# Altium PCB pcb.pcbdoc
Units mil, origin at the board's own origin, x right, y up, seen from the top; angles counter-clockwise.
Board outline 6000 x 4000 mil, 2 copper layers (Top Layer, Bottom Layer); 43 components, 33 nets, 134 pads, 50 vias.
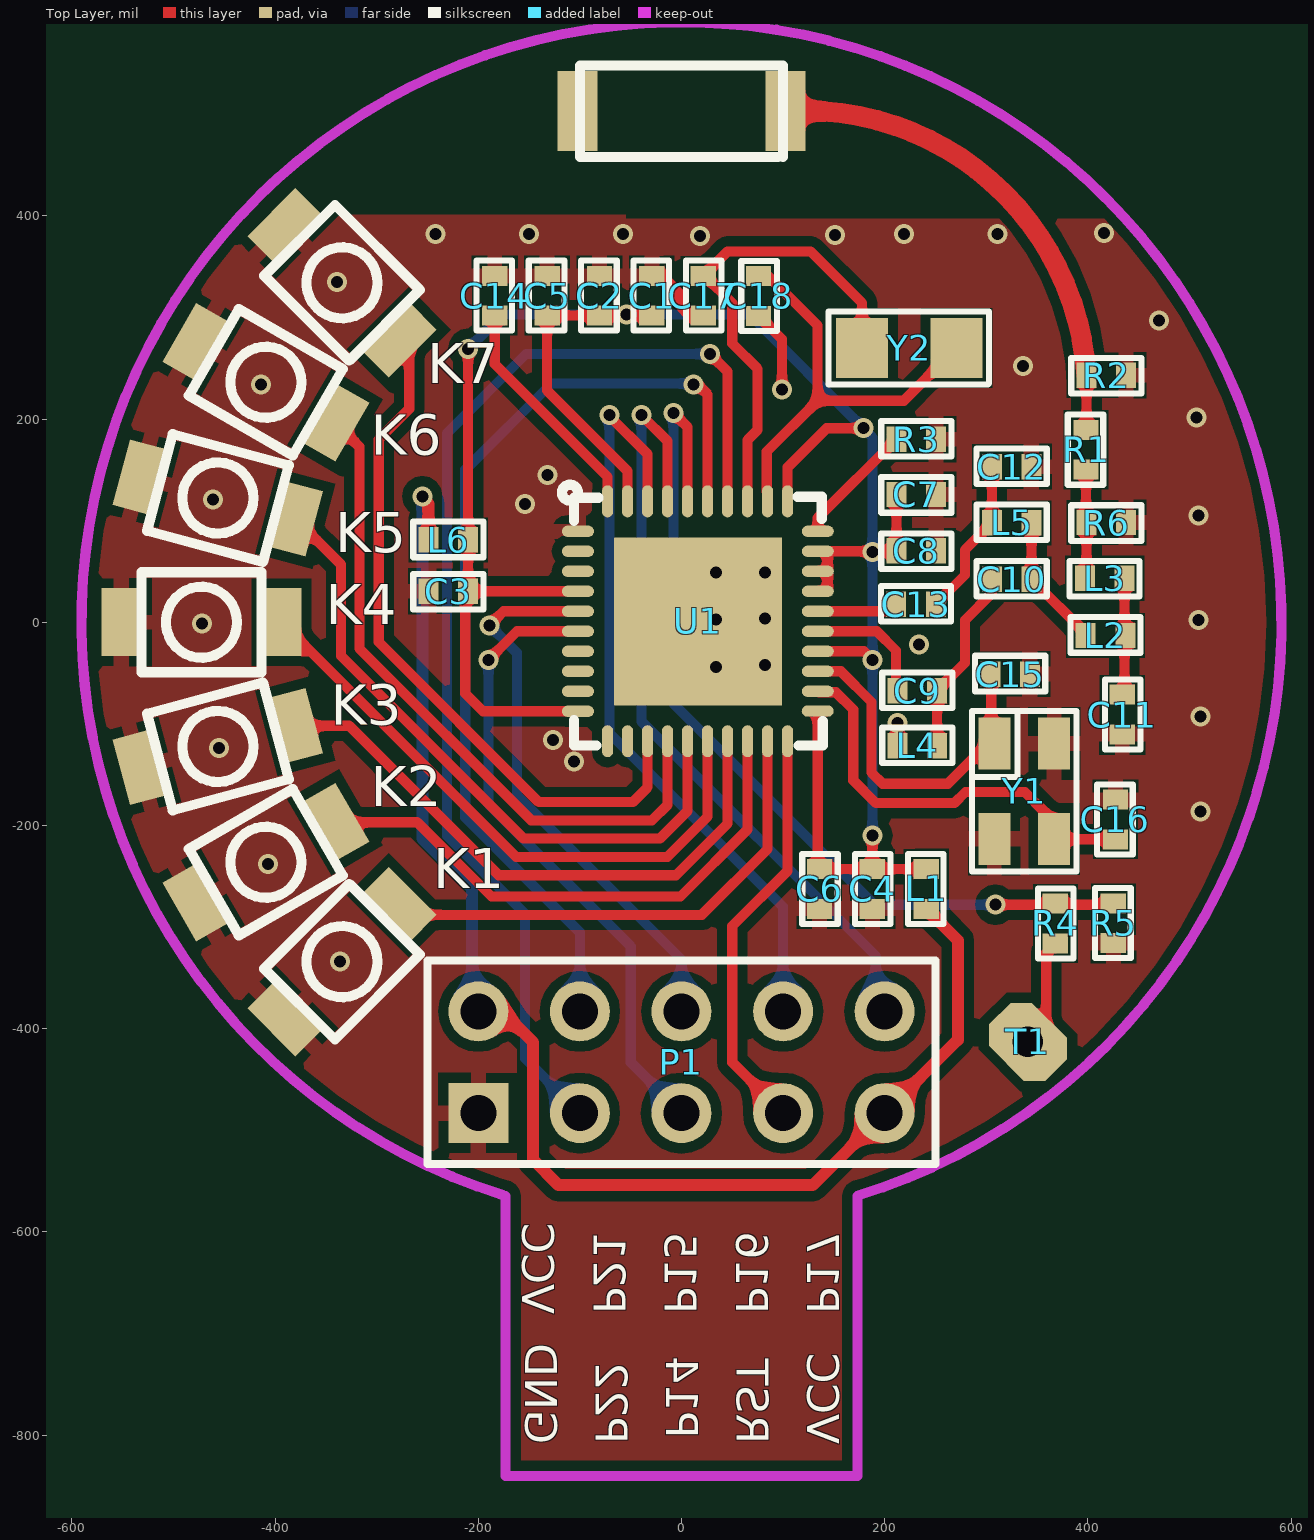
[diagram p0: Top Layer view]
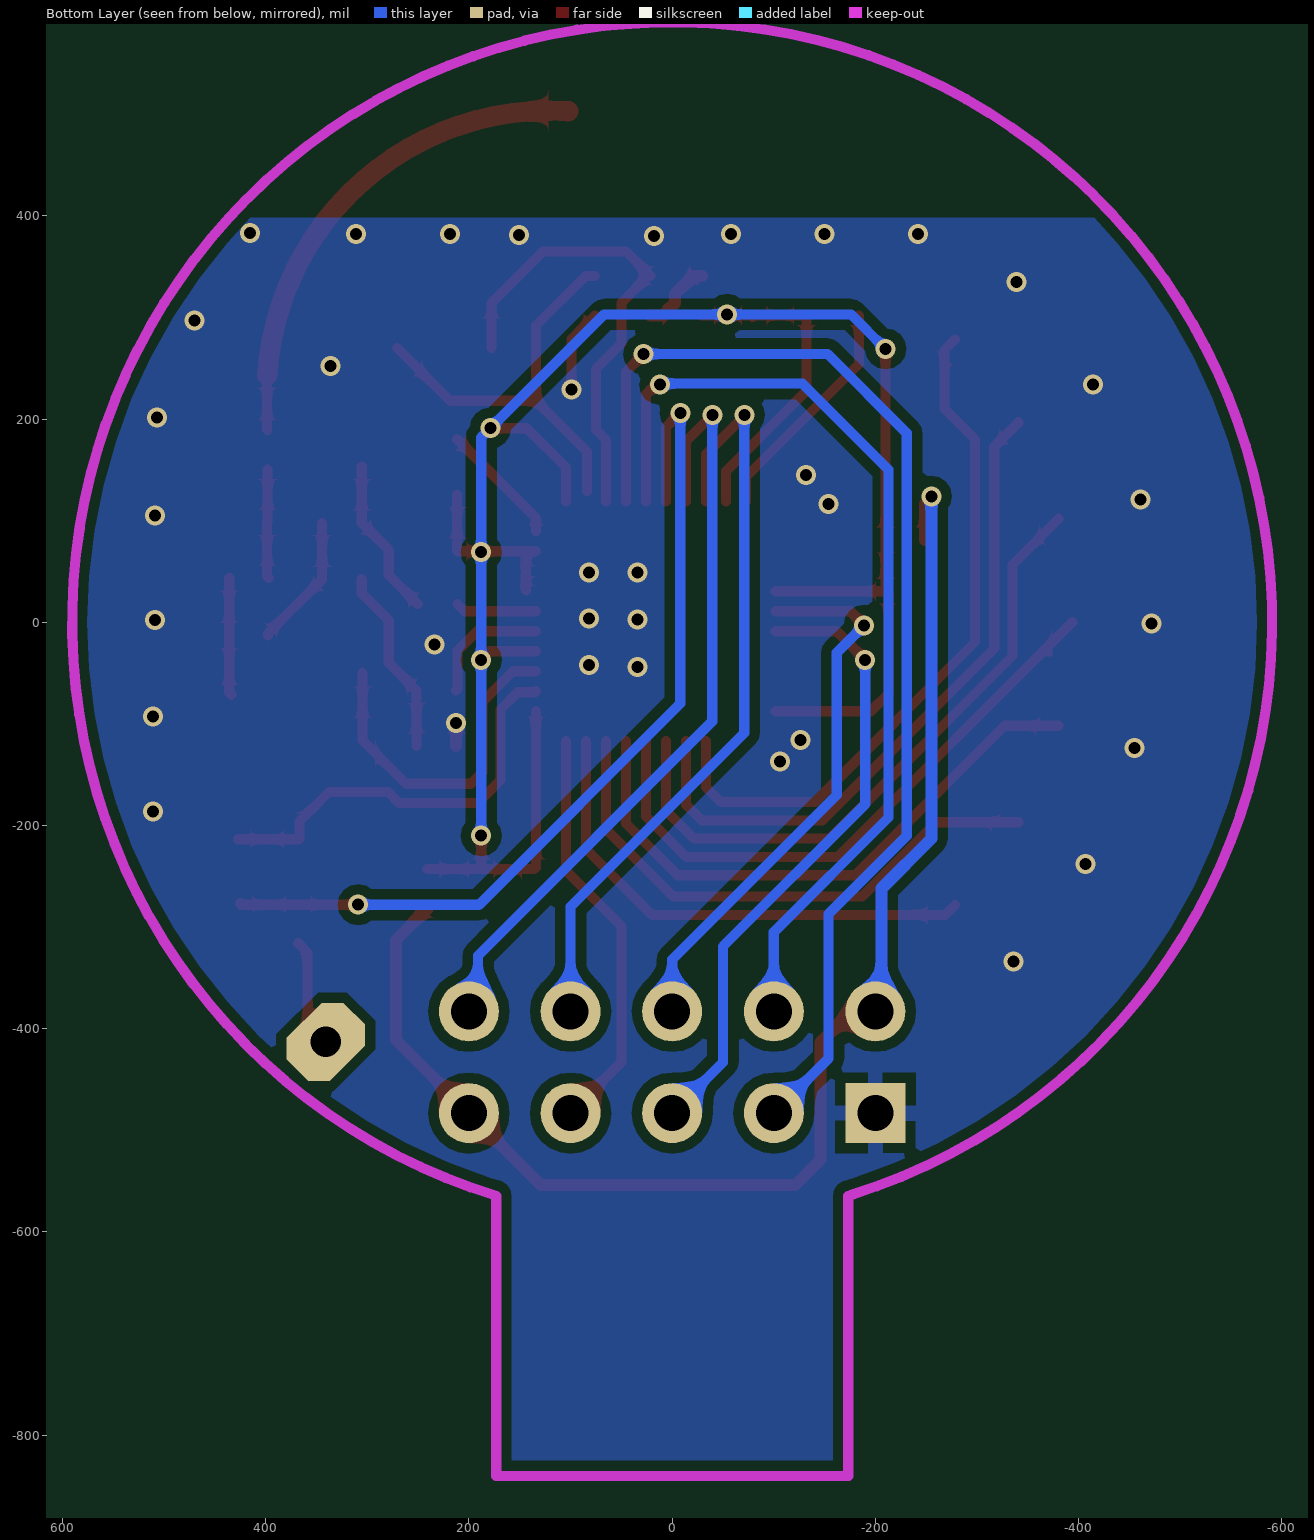
[diagram p1: Bottom Layer view, seen from below]

## Layer stack, top to bottom
Top Solder: solder mask 0.4, Solder Resist, Dk 3.5
Top Layer: signal copper 1.4
Dielectric1: dielectric 12.6, FR-4, Dk 4.8
Bottom Layer: signal copper 1.4
Bottom Solder: solder mask 0.4, Solder Resist, Dk 3.5

## Board outline
-2661,-1442 3339,-1442 3339,2558 -2661,2558

## Design rules (kind name [scope] priority, off if disabled: settings)
Clearance [All] p1: gap=7.99 ignorepadtopadclearanceinfootprint=FALSE
MinimumSolderMaskSliver [All] p1 off: minsoldermaskwidth=10
PolygonConnect PolygonConnect_96 [All vs IsNamedPolygon('GND_L01_P012')] p1: thpad.connectstyle=Relief thpad.reliefconductorwidth=10 thpad.reliefentries=4 thpad.polygonreliefangle="90 Angle" thpad.airgapwidth=10 smdpad.connectstyle=Relief smdpad.reliefconductorwidth=10 smdpad.reliefentries=4 smdpad.polygonreliefangle="90 Angle" smdpad.airgapwidth=10 via.connectstyle=Direct via.reliefconductorwidth=10 via.reliefentries=4 via.polygonreliefangle="90 Angle" via.airgapwidth=10
PolygonConnect PolygonConnect_95 [All vs IsNamedPolygon('GND_L01_P012')] p2: thpad.connectstyle=Relief thpad.reliefconductorwidth=10 thpad.reliefentries=4 thpad.polygonreliefangle="90 Angle" thpad.airgapwidth=10 smdpad.connectstyle=Direct smdpad.reliefconductorwidth=10 smdpad.reliefentries=4 smdpad.polygonreliefangle="90 Angle" smdpad.airgapwidth=10 via.connectstyle=Relief via.reliefconductorwidth=10 via.reliefentries=4 via.polygonreliefangle="90 Angle" via.airgapwidth=10
PolygonConnect PolygonConnect_94 [All vs IsNamedPolygon('GND_L02_P016')] p3: thpad.connectstyle=Relief thpad.reliefconductorwidth=15 thpad.reliefentries=4 thpad.polygonreliefangle="90 Angle" thpad.airgapwidth=10 smdpad.connectstyle=Relief smdpad.reliefconductorwidth=15 smdpad.reliefentries=4 smdpad.polygonreliefangle="90 Angle" smdpad.airgapwidth=10 via.connectstyle=Direct via.reliefconductorwidth=10 via.reliefentries=4 via.polygonreliefangle="90 Angle" via.airgapwidth=10
PolygonConnect PolygonConnect_93 [All vs IsNamedPolygon('GND_L01_P012')] p4: thpad.connectstyle=Relief thpad.reliefconductorwidth=15 thpad.reliefentries=4 thpad.polygonreliefangle="90 Angle" thpad.airgapwidth=10 smdpad.connectstyle=Relief smdpad.reliefconductorwidth=15 smdpad.reliefentries=4 smdpad.polygonreliefangle="90 Angle" smdpad.airgapwidth=10 via.connectstyle=Direct via.reliefconductorwidth=10 via.reliefentries=4 via.polygonreliefangle="90 Angle" via.airgapwidth=10
PolygonConnect PolygonConnect_92 [All vs IsNamedPolygon('GND_L01_P014')] p5: thpad.connectstyle=Relief thpad.reliefconductorwidth=15 thpad.reliefentries=4 thpad.polygonreliefangle="90 Angle" thpad.airgapwidth=10 smdpad.connectstyle=Relief smdpad.reliefconductorwidth=15 smdpad.reliefentries=4 smdpad.polygonreliefangle="90 Angle" smdpad.airgapwidth=10 via.connectstyle=Direct via.reliefconductorwidth=10 via.reliefentries=4 via.polygonreliefangle="90 Angle" via.airgapwidth=10
PolygonConnect PolygonConnect_91 [All vs IsNamedPolygon('GND_L01_P014')] p6: thpad.connectstyle=Relief thpad.reliefconductorwidth=15 thpad.reliefentries=4 thpad.polygonreliefangle="90 Angle" thpad.airgapwidth=10 smdpad.connectstyle=Relief smdpad.reliefconductorwidth=15 smdpad.reliefentries=4 smdpad.polygonreliefangle="90 Angle" smdpad.airgapwidth=10 via.connectstyle=Direct via.reliefconductorwidth=10 via.reliefentries=4 via.polygonreliefangle="90 Angle" via.airgapwidth=10
PolygonConnect PolygonConnect_90 [All vs IsNamedPolygon('GND_L01_P014')] p7: thpad.connectstyle=Relief thpad.reliefconductorwidth=5.91 thpad.reliefentries=4 thpad.polygonreliefangle="90 Angle" thpad.airgapwidth=10 smdpad.connectstyle=Relief smdpad.reliefconductorwidth=10 smdpad.reliefentries=4 smdpad.polygonreliefangle="90 Angle" smdpad.airgapwidth=10 via.connectstyle=Relief via.reliefconductorwidth=10 via.reliefentries=4 via.polygonreliefangle="90 Angle" via.airgapwidth=10
PolygonConnect PolygonConnect_89 [All vs IsNamedPolygon('GND_L02_P010')] p8: thpad.connectstyle=Relief thpad.reliefconductorwidth=15 thpad.reliefentries=4 thpad.polygonreliefangle="90 Angle" thpad.airgapwidth=10 smdpad.connectstyle=Relief smdpad.reliefconductorwidth=15 smdpad.reliefentries=4 smdpad.polygonreliefangle="90 Angle" smdpad.airgapwidth=10 via.connectstyle=Direct via.reliefconductorwidth=10 via.reliefentries=4 via.polygonreliefangle="90 Angle" via.airgapwidth=10
PolygonConnect PolygonConnect_88 [All vs IsNamedPolygon('GND_L01_P006')] p9: thpad.connectstyle=Relief thpad.reliefconductorwidth=15 thpad.reliefentries=4 thpad.polygonreliefangle="90 Angle" thpad.airgapwidth=10 smdpad.connectstyle=Relief smdpad.reliefconductorwidth=15 smdpad.reliefentries=4 smdpad.polygonreliefangle="90 Angle" smdpad.airgapwidth=10 via.connectstyle=Direct via.reliefconductorwidth=10 via.reliefentries=4 via.polygonreliefangle="90 Angle" via.airgapwidth=10
PolygonConnect PolygonConnect_87 [All vs IsNamedPolygon('GND_L02_P010')] p10: thpad.connectstyle=Relief thpad.reliefconductorwidth=15 thpad.reliefentries=4 thpad.polygonreliefangle="90 Angle" thpad.airgapwidth=10 smdpad.connectstyle=Relief smdpad.reliefconductorwidth=15 smdpad.reliefentries=4 smdpad.polygonreliefangle="90 Angle" smdpad.airgapwidth=10 via.connectstyle=Direct via.reliefconductorwidth=10 via.reliefentries=4 via.polygonreliefangle="90 Angle" via.airgapwidth=10
PolygonConnect PolygonConnect_86 [All vs IsNamedPolygon('Top Layer-GND')] p11: thpad.connectstyle=Relief thpad.reliefconductorwidth=10 thpad.reliefentries=4 thpad.polygonreliefangle="90 Angle" thpad.airgapwidth=10 smdpad.connectstyle=Relief smdpad.reliefconductorwidth=10 smdpad.reliefentries=4 smdpad.polygonreliefangle="90 Angle" smdpad.airgapwidth=10 via.connectstyle=Direct via.reliefconductorwidth=10 via.reliefentries=4 via.polygonreliefangle="90 Angle" via.airgapwidth=10
PolygonConnect PolygonConnect_85 [All vs IsNamedPolygon('GND_L01_P020')] p12: thpad.connectstyle=Relief thpad.reliefconductorwidth=10 thpad.reliefentries=4 thpad.polygonreliefangle="90 Angle" thpad.airgapwidth=10 smdpad.connectstyle=Relief smdpad.reliefconductorwidth=10 smdpad.reliefentries=4 smdpad.polygonreliefangle="90 Angle" smdpad.airgapwidth=10 via.connectstyle=Direct via.reliefconductorwidth=10 via.reliefentries=4 via.polygonreliefangle="90 Angle" via.airgapwidth=10
PolygonConnect PolygonConnect_84 [All vs IsNamedPolygon('Bottom Layer-GND')] p13: thpad.connectstyle=Relief thpad.reliefconductorwidth=10 thpad.reliefentries=4 thpad.polygonreliefangle="90 Angle" thpad.airgapwidth=10 smdpad.connectstyle=Relief smdpad.reliefconductorwidth=10 smdpad.reliefentries=4 smdpad.polygonreliefangle="90 Angle" smdpad.airgapwidth=10 via.connectstyle=Direct via.reliefconductorwidth=10 via.reliefentries=4 via.polygonreliefangle="90 Angle" via.airgapwidth=10
PolygonConnect PolygonConnect_83 [All vs IsNamedPolygon('AGND-top')] p14: thpad.connectstyle=Relief thpad.reliefconductorwidth=20 thpad.reliefentries=4 thpad.polygonreliefangle="90 Angle" thpad.airgapwidth=10 smdpad.connectstyle=Relief smdpad.reliefconductorwidth=20 smdpad.reliefentries=4 smdpad.polygonreliefangle="90 Angle" smdpad.airgapwidth=10 via.connectstyle=Direct via.reliefconductorwidth=10 via.reliefentries=4 via.polygonreliefangle="90 Angle" via.airgapwidth=10
PolygonConnect PolygonConnect_82 [All vs IsNamedPolygon('Totalcurrent-bottom')] p15: thpad.connectstyle=Relief thpad.reliefconductorwidth=20 thpad.reliefentries=4 thpad.polygonreliefangle="90 Angle" thpad.airgapwidth=10 smdpad.connectstyle=Relief smdpad.reliefconductorwidth=20 smdpad.reliefentries=4 smdpad.polygonreliefangle="90 Angle" smdpad.airgapwidth=10 via.connectstyle=Direct via.reliefconductorwidth=10 via.reliefentries=4 via.polygonreliefangle="90 Angle" via.airgapwidth=10
PolygonConnect PolygonConnect_81 [All vs IsNamedPolygon('GND-top')] p16: thpad.connectstyle=Relief thpad.reliefconductorwidth=20 thpad.reliefentries=4 thpad.polygonreliefangle="90 Angle" thpad.airgapwidth=10 smdpad.connectstyle=Relief smdpad.reliefconductorwidth=20 smdpad.reliefentries=4 smdpad.polygonreliefangle="90 Angle" smdpad.airgapwidth=10 via.connectstyle=Direct via.reliefconductorwidth=10 via.reliefentries=4 via.polygonreliefangle="90 Angle" via.airgapwidth=10
PolygonConnect PolygonConnect_80 [All vs IsNamedPolygon('GND-bottom')] p17: thpad.connectstyle=Relief thpad.reliefconductorwidth=20 thpad.reliefentries=4 thpad.polygonreliefangle="90 Angle" thpad.airgapwidth=10 smdpad.connectstyle=Relief smdpad.reliefconductorwidth=20 smdpad.reliefentries=4 smdpad.polygonreliefangle="90 Angle" smdpad.airgapwidth=10 via.connectstyle=Direct via.reliefconductorwidth=10 via.reliefentries=4 via.polygonreliefangle="90 Angle" via.airgapwidth=10
PolygonConnect PolygonConnect_79 [All vs IsNamedPolygon('AGND-bottom')] p18: thpad.connectstyle=Relief thpad.reliefconductorwidth=20 thpad.reliefentries=4 thpad.polygonreliefangle="90 Angle" thpad.airgapwidth=10 smdpad.connectstyle=Relief smdpad.reliefconductorwidth=20 smdpad.reliefentries=4 smdpad.polygonreliefangle="90 Angle" smdpad.airgapwidth=10 via.connectstyle=Direct via.reliefconductorwidth=10 via.reliefentries=4 via.polygonreliefangle="90 Angle" via.airgapwidth=10
PolygonConnect PolygonConnect_78 [All vs IsNamedPolygon('AGND-BOTTOM')] p19: thpad.connectstyle=Relief thpad.reliefconductorwidth=20 thpad.reliefentries=4 thpad.polygonreliefangle="90 Angle" thpad.airgapwidth=10 smdpad.connectstyle=Relief smdpad.reliefconductorwidth=20 smdpad.reliefentries=4 smdpad.polygonreliefangle="90 Angle" smdpad.airgapwidth=10 via.connectstyle=Direct via.reliefconductorwidth=10 via.reliefentries=4 via.polygonreliefangle="90 Angle" via.airgapwidth=10
PolygonConnect PolygonConnect_77 [All vs IsNamedPolygon('AGND-BOTTOM')] p20: thpad.connectstyle=Relief thpad.reliefconductorwidth=20 thpad.reliefentries=4 thpad.polygonreliefangle="90 Angle" thpad.airgapwidth=10 smdpad.connectstyle=Relief smdpad.reliefconductorwidth=20 smdpad.reliefentries=4 smdpad.polygonreliefangle="90 Angle" smdpad.airgapwidth=10 via.connectstyle=Direct via.reliefconductorwidth=10 via.reliefentries=4 via.polygonreliefangle="90 Angle" via.airgapwidth=10
PolygonConnect PolygonConnect_76 [All vs IsNamedPolygon('Totalcurrent-top')] p21: thpad.connectstyle=Relief thpad.reliefconductorwidth=20 thpad.reliefentries=4 thpad.polygonreliefangle="90 Angle" thpad.airgapwidth=10 smdpad.connectstyle=Relief smdpad.reliefconductorwidth=20 smdpad.reliefentries=4 smdpad.polygonreliefangle="90 Angle" smdpad.airgapwidth=10 via.connectstyle=Direct via.reliefconductorwidth=10 via.reliefentries=4 via.polygonreliefangle="90 Angle" via.airgapwidth=10
PolygonConnect PolygonConnect_75 [All vs IsNamedPolygon('Totalcurrent-bottom')] p22: thpad.connectstyle=Relief thpad.reliefconductorwidth=20 thpad.reliefentries=4 thpad.polygonreliefangle="90 Angle" thpad.airgapwidth=10 smdpad.connectstyle=Relief smdpad.reliefconductorwidth=20 smdpad.reliefentries=4 smdpad.polygonreliefangle="90 Angle" smdpad.airgapwidth=10 via.connectstyle=Direct via.reliefconductorwidth=10 via.reliefentries=4 via.polygonreliefangle="90 Angle" via.airgapwidth=10
PolygonConnect PolygonConnect_74 [All vs IsNamedPolygon('Totalcurrent-bottom')] p23: thpad.connectstyle=Relief thpad.reliefconductorwidth=20 thpad.reliefentries=4 thpad.polygonreliefangle="90 Angle" thpad.airgapwidth=10 smdpad.connectstyle=Relief smdpad.reliefconductorwidth=20 smdpad.reliefentries=4 smdpad.polygonreliefangle="90 Angle" smdpad.airgapwidth=10 via.connectstyle=Direct via.reliefconductorwidth=10 via.reliefentries=4 via.polygonreliefangle="90 Angle" via.airgapwidth=10
PolygonConnect PolygonConnect_73 [All vs IsNamedPolygon('Totalcurrent-top')] p24: connectstyle=Relief reliefconductorwidth=10 reliefentries=4 polygonreliefangle="90 Angle" airgapwidth=10
PolygonConnect PolygonConnect_72 [All vs IsNamedPolygon('Totalcurrent-top')] p25: thpad.connectstyle=Relief thpad.reliefconductorwidth=20 thpad.reliefentries=4 thpad.polygonreliefangle="90 Angle" thpad.airgapwidth=10 smdpad.connectstyle=Relief smdpad.reliefconductorwidth=20 smdpad.reliefentries=4 smdpad.polygonreliefangle="90 Angle" smdpad.airgapwidth=10 via.connectstyle=Direct via.reliefconductorwidth=10 via.reliefentries=4 via.polygonreliefangle="90 Angle" via.airgapwidth=10
PolygonConnect PolygonConnect_71 [All vs IsNamedPolygon('Totalcurrent-top')] p26: connectstyle=Relief reliefconductorwidth=10 reliefentries=4 polygonreliefangle="45 Angle" airgapwidth=10
PolygonConnect PolygonConnect_70 [All vs IsNamedPolygon('GND-top')] p27: connectstyle=Relief reliefconductorwidth=10 reliefentries=4 polygonreliefangle="45 Angle" airgapwidth=10
PolygonConnect PolygonConnect_69 [All vs IsNamedPolygon('GND-bottom')] p28: connectstyle=Relief reliefconductorwidth=10 reliefentries=4 polygonreliefangle="45 Angle" airgapwidth=10
PolygonConnect PolygonConnect_68 [All vs IsNamedPolygon('GND-top')] p29: connectstyle=Relief reliefconductorwidth=10 reliefentries=4 polygonreliefangle="45 Angle" airgapwidth=10
PolygonConnect PolygonConnect_67 [All vs IsNamedPolygon('GND-top')] p30: connectstyle=Relief reliefconductorwidth=10 reliefentries=4 polygonreliefangle="45 Angle" airgapwidth=10
PolygonConnect PolygonConnect_66 [All vs IsNamedPolygon('Totalcurrent-bottom')] p31: connectstyle=Relief reliefconductorwidth=10 reliefentries=4 polygonreliefangle="45 Angle" airgapwidth=10
PolygonConnect PolygonConnect_65 [All vs IsNamedPolygon('AGND-BOTTOM')] p32: connectstyle=Relief reliefconductorwidth=10 reliefentries=4 polygonreliefangle="45 Angle" airgapwidth=10
PolygonConnect PolygonConnect_64 [All vs IsNamedPolygon('Totalcurrent-bottom')] p33: connectstyle=Relief reliefconductorwidth=10 reliefentries=4 polygonreliefangle="45 Angle" airgapwidth=10
PolygonConnect PolygonConnect_63 [All vs IsNamedPolygon('AGND-BOTTOM')] p34: connectstyle=Relief reliefconductorwidth=10 reliefentries=4 polygonreliefangle="45 Angle" airgapwidth=10
PolygonConnect PolygonConnect_62 [All vs IsNamedPolygon('AGND-BOTTOM')] p35: connectstyle=Relief reliefconductorwidth=10 reliefentries=4 polygonreliefangle="45 Angle" airgapwidth=10
PolygonConnect PolygonConnect_61 [All vs IsNamedPolygon('Totalcurrent-bottom')] p36: connectstyle=Relief reliefconductorwidth=10 reliefentries=4 polygonreliefangle="45 Angle" airgapwidth=10
PolygonConnect PolygonConnect_60 [All vs IsNamedPolygon('AGND2-top')] p37: connectstyle=Relief reliefconductorwidth=10 reliefentries=4 polygonreliefangle="45 Angle" airgapwidth=10
PolygonConnect PolygonConnect_59 [All vs IsNamedPolygon('AGND-BOTTOM')] p38: connectstyle=Relief reliefconductorwidth=10 reliefentries=4 polygonreliefangle="45 Angle" airgapwidth=10
PolygonConnect PolygonConnect_58 [All vs IsNamedPolygon('TotalcurrentLayer-bottom')] p39: connectstyle=Relief reliefconductorwidth=10 reliefentries=4 polygonreliefangle="45 Angle" airgapwidth=10
PolygonConnect PolygonConnect_57 [All vs IsNamedPolygon('TotalcurrentLayer-top')] p40: connectstyle=Relief reliefconductorwidth=10 reliefentries=4 polygonreliefangle="45 Angle" airgapwidth=10
PolygonConnect PolygonConnect_56 [All vs IsNamedPolygon('TotalcurrentLayer-No Net')] p41: connectstyle=Relief reliefconductorwidth=10 reliefentries=4 polygonreliefangle="45 Angle" airgapwidth=10
PolygonConnect PolygonConnect_55 [All vs IsNamedPolygon('TotalcurrentLayer-No Net')] p42: connectstyle=Relief reliefconductorwidth=10 reliefentries=4 polygonreliefangle="45 Angle" airgapwidth=10
PolygonConnect PolygonConnect_54 [All vs IsNamedPolygon('TotalcurrentLayer-No Net')] p43: connectstyle=Direct reliefconductorwidth=10 reliefentries=4 polygonreliefangle="90 Angle" airgapwidth=10
PolygonConnect PolygonConnect_53 [InNet('TOTALCURRENTOUT') vs IsNamedPolygon('TotalcurrentLayer-No Net')] p44: connectstyle=Relief reliefconductorwidth=10 reliefentries=4 polygonreliefangle="45 Angle" airgapwidth=10
PolygonConnect PolygonConnect_52 [All vs IsNamedPolygon('TotalcurrentLayer-No Net')] p45: connectstyle=Relief reliefconductorwidth=10 reliefentries=4 polygonreliefangle="45 Angle" airgapwidth=10
PolygonConnect PolygonConnect_51 [All vs IsNamedPolygon('Bottom-Layer-GND')] p46: connectstyle=Relief reliefconductorwidth=10 reliefentries=4 polygonreliefangle="45 Angle" airgapwidth=10
PolygonConnect PolygonConnect_50 [All vs IsNamedPolygon('Bottom-Layer-GND')] p47: connectstyle=Relief reliefconductorwidth=10 reliefentries=4 polygonreliefangle="45 Angle" airgapwidth=10
PolygonConnect PolygonConnect_49 [InNet('GND') vs IsNamedPolygon('Top Layer-No Net')] p48: connectstyle=Relief reliefconductorwidth=20 reliefentries=4 polygonreliefangle="90 Angle" airgapwidth=10
PolygonConnect PolygonConnect_48 [All vs IsNamedPolygon('bottom-agnd')] p49: connectstyle=Relief reliefconductorwidth=20 reliefentries=4 polygonreliefangle="90 Angle" airgapwidth=10
PolygonConnect PolygonConnect_47 [All vs IsNamedPolygon('bottom-gnd')] p50: connectstyle=Relief reliefconductorwidth=20 reliefentries=4 polygonreliefangle="90 Angle" airgapwidth=10
PolygonConnect PolygonConnect_46 [All vs IsNamedPolygon('bottom-gnd')] p51: connectstyle=Relief reliefconductorwidth=20 reliefentries=4 polygonreliefangle="90 Angle" airgapwidth=10
PolygonConnect PolygonConnect_45 [All vs IsNamedPolygon('top-agnd')] p52: connectstyle=Relief reliefconductorwidth=20 reliefentries=4 polygonreliefangle="90 Angle" airgapwidth=10
PolygonConnect PolygonConnect_44 [All vs IsNamedPolygon('top-gnd')] p53: connectstyle=Relief reliefconductorwidth=20 reliefentries=4 polygonreliefangle="90 Angle" airgapwidth=10
PolygonConnect PolygonConnect_43 [All vs IsNamedPolygon('Topagndlayer-No Net')] p54: connectstyle=Relief reliefconductorwidth=20 reliefentries=4 polygonreliefangle="90 Angle" airgapwidth=10
PolygonConnect PolygonConnect_42 [All vs IsNamedPolygon('Topgndlayer-No Net')] p55: connectstyle=Relief reliefconductorwidth=20 reliefentries=4 polygonreliefangle="90 Angle" airgapwidth=10
PolygonConnect PolygonConnect_41 [All vs IsNamedPolygon('bottomagnd')] p56: connectstyle=Relief reliefconductorwidth=20 reliefentries=4 polygonreliefangle="90 Angle" airgapwidth=10
PolygonConnect PolygonConnect_40 [All vs IsNamedPolygon('bottomgnd')] p57: connectstyle=Relief reliefconductorwidth=20 reliefentries=4 polygonreliefangle="90 Angle" airgapwidth=10
PolygonConnect PolygonConnect_39 [InNet('CURRENT') vs IsNamedPolygon('Topgndlayer-No Net')] p58: connectstyle=Relief reliefconductorwidth=20 reliefentries=4 polygonreliefangle="90 Angle" airgapwidth=10
PolygonConnect PolygonConnect_38 [All vs IsNamedPolygon('Topagndlayer-No Net')] p59: connectstyle=Direct reliefconductorwidth=10 reliefentries=4 polygonreliefangle="90 Angle" airgapwidth=10
PolygonConnect PolygonConnect_37 [All vs IsNamedPolygon('Topgndlayer-No Net')] p60: connectstyle=Relief reliefconductorwidth=20 reliefentries=4 polygonreliefangle="90 Angle" airgapwidth=10
PolygonConnect PolygonConnect_36 [All vs IsNamedPolygon('bottomagnd')] p61: connectstyle=Relief reliefconductorwidth=20 reliefentries=4 polygonreliefangle="90 Angle" airgapwidth=10
PolygonConnect PolygonConnect_35 [All vs IsNamedPolygon('Topgndlayer-No Net')] p62: connectstyle=Relief reliefconductorwidth=20 reliefentries=4 polygonreliefangle="90 Angle" airgapwidth=10
PolygonConnect PolygonConnect_34 [InNet('16.8V') vs IsNamedPolygon('bottomgnd')] p63: connectstyle=Relief reliefconductorwidth=20 reliefentries=4 polygonreliefangle="90 Angle" airgapwidth=10
PolygonConnect PolygonConnect_33 [All vs IsNamedPolygon('Topgndlayer-No Net')] p64: connectstyle=Relief reliefconductorwidth=20000 reliefentries=4 polygonreliefangle="90 Angle" airgapwidth=10
PolygonConnect PolygonConnect_32 [All vs IsNamedPolygon('Topagndlayer-No Net')] p65: connectstyle=Relief reliefconductorwidth=27.56 reliefentries=4 polygonreliefangle="90 Angle" airgapwidth=10
PolygonConnect PolygonConnect_31 [All vs IsNamedPolygon('Topgndlayer-No Net')] p66: connectstyle=Relief reliefconductorwidth=20 reliefentries=4 polygonreliefangle="90 Angle" airgapwidth=10
PolygonConnect PolygonConnect_30 [All vs IsNamedPolygon('Topgndlayer-No Net')] p67: connectstyle=Relief reliefconductorwidth=10 reliefentries=4 polygonreliefangle="90 Angle" airgapwidth=10
PolygonConnect PolygonConnect_29 [All vs IsNamedPolygon('bottomgnd')] p68: connectstyle=Relief reliefconductorwidth=10 reliefentries=4 polygonreliefangle="90 Angle" airgapwidth=10
PolygonConnect PolygonConnect_28 [All vs IsNamedPolygon('bottomagnd')] p69: connectstyle=Relief reliefconductorwidth=10 reliefentries=4 polygonreliefangle="90 Angle" airgapwidth=10
PolygonConnect PolygonConnect_27 [All vs IsNamedPolygon('Topgndlayer-No Net')] p70: connectstyle=Relief reliefconductorwidth=10 reliefentries=4 polygonreliefangle="90 Angle" airgapwidth=10
PolygonConnect PolygonConnect_26 [InNet('AGND') vs IsNamedPolygon('Topagndlayer-No Net')] p71: connectstyle=Relief reliefconductorwidth=20 reliefentries=4 polygonreliefangle="90 Angle" airgapwidth=10
PolygonConnect PolygonConnect_25 [All vs IsNamedPolygon('bottomagnd')] p72: connectstyle=Direct reliefconductorwidth=10 reliefentries=4 polygonreliefangle="90 Angle" airgapwidth=10
PolygonConnect PolygonConnect_24 [All vs IsNamedPolygon('bottomgnd')] p73: connectstyle=Direct reliefconductorwidth=10 reliefentries=4 polygonreliefangle="90 Angle" airgapwidth=10
PolygonConnect PolygonConnect_23 [All vs IsNamedPolygon('bottomagnd')] p74: connectstyle=Direct reliefconductorwidth=10 reliefentries=4 polygonreliefangle="90 Angle" airgapwidth=10
PolygonConnect PolygonConnect_22 [All vs IsNamedPolygon('bottomagnd')] p75: connectstyle=Direct reliefconductorwidth=10 reliefentries=4 polygonreliefangle="90 Angle" airgapwidth=10
PolygonConnect PolygonConnect_21 [All vs IsNamedPolygon('Topgndlayer-No Net')] p76: connectstyle=Direct reliefconductorwidth=10 reliefentries=4 polygonreliefangle="90 Angle" airgapwidth=10
PolygonConnect PolygonConnect_20 [All vs IsNamedPolygon('Topagndlayer-No Net')] p77: connectstyle=Direct reliefconductorwidth=10 reliefentries=4 polygonreliefangle="90 Angle" airgapwidth=10
PolygonConnect PolygonConnect_19 [All vs IsNamedPolygon('Topagndlayer-No Net')] p78: connectstyle=Direct reliefconductorwidth=10 reliefentries=4 polygonreliefangle="90 Angle" airgapwidth=10
PolygonConnect PolygonConnect_18 [All vs IsNamedPolygon('Topagndlayer-No Net')] p79: connectstyle=Direct reliefconductorwidth=10 reliefentries=4 polygonreliefangle="90 Angle" airgapwidth=10
PolygonConnect PolygonConnect_17 [All vs IsNamedPolygon('Topgndlayer-No Net')] p80: connectstyle=Direct reliefconductorwidth=10 reliefentries=4 polygonreliefangle="90 Angle" airgapwidth=10
PolygonConnect PolygonConnect_16 [InNet('AGND') vs IsNamedPolygon('toplayer-No Net')] p81: connectstyle=Direct reliefconductorwidth=10 reliefentries=4 polygonreliefangle="90 Angle" airgapwidth=10
PolygonConnect PolygonConnect_15 [All vs IsNamedPolygon('toplayer-No Net')] p82: connectstyle=Direct reliefconductorwidth=10 reliefentries=4 polygonreliefangle="90 Angle" airgapwidth=10
PolygonConnect PolygonConnect_14 [InNet('AGND') vs IsNamedPolygon('bottomlayer-No Net')] p83: connectstyle=Direct reliefconductorwidth=10 reliefentries=4 polygonreliefangle="90 Angle" airgapwidth=10
PolygonConnect PolygonConnect_13 [InNet('AGND') vs IsNamedPolygon('toplayer-No Net')] p84: connectstyle=Direct reliefconductorwidth=10 reliefentries=4 polygonreliefangle="90 Angle" airgapwidth=10
PolygonConnect PolygonConnect_12 [InNet('AGND') vs IsNamedPolygon('toplayer-No Net')] p85: connectstyle=Direct reliefconductorwidth=10 reliefentries=4 polygonreliefangle="90 Angle" airgapwidth=10
PolygonConnect PolygonConnect_11 [All vs IsNamedPolygon('toplayer-No Net')] p86: connectstyle=Direct reliefconductorwidth=10 reliefentries=4 polygonreliefangle="90 Angle" airgapwidth=10
PolygonConnect PolygonConnect_10 [All vs IsNamedPolygon('bottomlayer-No Net')] p87: connectstyle=Direct reliefconductorwidth=10 reliefentries=4 polygonreliefangle="90 Angle" airgapwidth=10
PolygonConnect PolygonConnect_9 [InNet('AGND') vs IsNamedPolygon('bottomlayer-No Net')] p88: connectstyle=Direct reliefconductorwidth=10 reliefentries=4 polygonreliefangle="90 Angle" airgapwidth=10
PolygonConnect PolygonConnect_8 [InNet('AGND') vs IsNamedPolygon('toplayer-No Net')] p89: connectstyle=Direct reliefconductorwidth=10 reliefentries=4 polygonreliefangle="90 Angle" airgapwidth=10
PolygonConnect PolygonConnect_7 [All vs IsNamedPolygon('bottomlayer-No Net')] p90: connectstyle=Direct reliefconductorwidth=10 reliefentries=4 polygonreliefangle="90 Angle" airgapwidth=10
PolygonConnect PolygonConnect_6 [All vs IsNamedPolygon('toplayer-No Net')] p91: connectstyle=Direct reliefconductorwidth=10 reliefentries=4 polygonreliefangle="90 Angle" airgapwidth=10
PolygonConnect PolygonConnect_5 [InNet('AGND') vs IsNamedPolygon('toplayer-No Net')] p92: connectstyle=Direct reliefconductorwidth=10 reliefentries=4 polygonreliefangle="90 Angle" airgapwidth=10
PolygonConnect PolygonConnect_4 [InNet('AGND') vs IsNamedPolygon('Bottomlayer-No Net')] p93: connectstyle=Direct reliefconductorwidth=10 reliefentries=4 polygonreliefangle="90 Angle" airgapwidth=10
PolygonConnect PolygonConnect_3 [InNet('AGND') vs IsNamedPolygon('AGND_L01_P012')] p94: connectstyle=Direct reliefconductorwidth=10 reliefentries=4 polygonreliefangle="90 Angle" airgapwidth=10
PolygonConnect PolygonConnect_2 [InNet('AGND') vs IsNamedPolygon('AGND_L02_P010')] p95: connectstyle=Direct reliefconductorwidth=10 reliefentries=4 polygonreliefangle="90 Angle" airgapwidth=10
PolygonConnect PolygonConnect_1 [All vs IsNamedPolygon('Top Layer-No Net')] p96: connectstyle=Direct reliefconductorwidth=10 reliefentries=4 polygonreliefangle="90 Angle" airgapwidth=10
PolygonConnect [All] p97: connectstyle=Relief reliefconductorwidth=10 reliefentries=4 polygonreliefangle="90 Angle" airgapwidth=10
RoutingVias [All] p1: holewidth=28 width=50 viastyle="Through Hole" minholewidth=28 minwidth=50 maxholewidth=28 maxwidth=50
SilkToSilkClearance [All] p1 off: silktosilkclearance=10
SilkToSolderMaskClearance [IsPad] p1 off: minsilkscreentomaskgap=10 clearancetoexposedcopper=TRUE
SolderMaskExpansion [All] p1: expansion=4
Width [All] p1: maxlimit=100 minlimit=10 preferedwidth=23.62
27 further rules are at their usual default settings.

## Classes and differential pairs
component class Sch: C15 C18 K1 K2 K3 K4 K5 K6 K7

## Components (designator, comment, footprint, x,y, rotation, side; value= is the part's Value field where it differs from the comment)
C1 "100nF" 0402_SMALL -17.3,310.65 r90 top
C2 "100nF" 0402_SMALL -68.86,310.65 r90 top
C3 "100nF" 0402_SMALL -218.65,42.32 r180 top
C4 "2.2uF" 0402_SMALL 176.08,-251.65 r270 top
C5 "1uF" 0402_SMALL -120.43,310.65 r90 top
C6 "100nF" 0402_SMALL 124,-251.65 r270 top
C7 "100nF" 0402_SMALL 242,137.61 r180 top
C8 "220p" 0402_SMALL 242,82.23 r180 top
C9 "18p" 0402_SMALL 221.3,-79.15 r0 top
C10 "1p" 0402_SMALL 314.15,30.54 r0 top
C11 "CAP" 0402_SMALL 422,-80 r270 top
C12 "1p" 0402_SMALL 314.15,141.32 r0 top
C13 "18p" 0402_SMALL 220,6 r0 top
C14 "1uF" 0402_SMALL -172,310.65 r90 top
C15 "27p" 0402_SMALL 312.65,-62.84 r0 top
C16 "27p" 0402_SMALL 439,-205 r90 top
C17 "15p" 0402_SMALL 9.59,332.35 r270 top
C18 "15p" 0402_SMALL 64,332 r270 top
K1 "" MiniKey -334.07,-334.07 r45 top
K2 "" MiniKey -409.15,-236.22 r30 top
K3 "" MiniKey -456.34,-122.28 r15 top
K4 "" MiniKey -472.44,0 r0 top
K5 "" MiniKey -456.34,122.28 r345 top
K6 "" MiniKey -409.15,236.22 r330 top
K7 "" MiniKey -334.07,334.07 r315 top
L1 "2nH" 0402_SMALL 252.84,-273.35 r90 top
L2 "1nH" 0402_SMALL 406.49,-24.84 r0 top
L3 "1nH" 0402_SMALL 427.35,55.23 r180 top
L4 "2uH" 0402_SMALL 221.3,-133.46 r0 top
L5 "2nH" 0402_SMALL 314.15,85.93 r0 top
L6 "2nH" 0402_SMALL -240.35,69.16 r0 top
P1 "Header 5X2" HDR2_5 0,-433.07 r0 top
R1 "0R" 0402_SMALL 410,159 r90 top
R2 "NC" 0402_SMALL 429,254.84 r180 top
R3 "56K" 0402_SMALL 220.3,168.32 r0 top
R4 "56K" 0402_SMALL 356.16,-285.65 r270 top
R5 "56K" 0402_SMALL 437,-307 r90 top
R6 "NC" 0402_SMALL 429,110 r180 top
T1 "Pad" T 341,-413 r0 top
U1 "CC2540" CC2530_QFN -105.46,89.91 r0 top
Y1 "32M" CY_3225 350,-123 r270 top
Y2 "32.768K" CRYSTAL_3215 211.65,243 r0 top
? "ANT_SMA" Wire 0,503 r180 top

## Footprints (in the part's own frame and the unit in brackets; to place one, negate y for a bottom-side part, rotate by r counter-clockwise, add the part's x,y. Pads: shape width x height; smd on the part's side, far side on the other; paste and mask are expansions set on the pad)
0402_SMALL [mm]
  rect 0.5x0.635 smd: 1(-0.22,0.301) 2(0.771,0.301)
  silkscreen extent -0.6,-0.13 1.15,0.76
CC2530_QFN [mm]
  oval 0.8x0.28 smd: 1(0.09,-0.009) 2(0.09,-0.509) 3(0.09,-1.009) 4(0.09,-1.509) 5(0.09,-2.009) 6(0.09,-2.509) 7(0.09,-3.009) 8(0.09,-3.509) 9(0.09,-4.009) 10(0.09,-4.509) 21(6.085,-4.505) 22(6.087,-4.009) 23(6.087,-3.509) 24(6.087,-3.009) 25(6.087,-2.509) 26(6.087,-2.009) 27(6.087,-1.509) 28(6.087,-1.009) 29(6.087,-0.509) 30(6.087,-0.009)
  oval 0.28x0.8 smd: 11(0.832,-5.258) 12(1.332,-5.258) 13(1.832,-5.258) 14(2.332,-5.258) 15(2.832,-5.258) 16(3.332,-5.258) 17(3.832,-5.258) 18(4.332,-5.258) 19(4.832,-5.258) 20(5.332,-5.258) 31(5.332,0.739) 32(4.832,0.739) 33(4.332,0.739) 34(3.832,0.739) 35(3.332,0.739) 36(2.832,0.739) 37(2.332,0.739) 38(1.832,0.739) 39(1.332,0.739) 40(0.832,0.739)
  rect 4.2x4.2 smd: 41(3.089,-2.259)
  silkscreen extent -0.31,-5.37 6.21,1.16
CRYSTAL_3215 [mm]
  rect 1.3x1.5 smd: 1(-0.862,0.685) 2(1.5,0.685)
  silkscreen extent -1.7,-0.23 2.31,1.6
CY_3225 [mm]
  rect 1.3x0.8 smd: 1(-0.095,-1.07) 2(2.293,-1.07) 3(2.293,0.428) 4(-0.095,0.428)
  silkscreen extent -0.91,-1.63 3.11,0.99
HDR2_5 [mm] "Connector; Header; 5x2 Position"
  rect 1.5x1.5 hole 0.9: 1(-5.08,-1.27)
  round 1.5 hole 0.9: 2(-5.08,1.27) 3(-2.54,-1.27) 4(-2.54,1.27) 5(0,-1.27) 6(0,1.27) 7(2.54,-1.27) 8(2.54,1.27) 9(5.08,-1.27) 10(5.08,1.27)
  silkscreen extent -6.35,-2.54 6.35,2.54
MiniKey [mm]
  rect 1x1.7 smd: 1(-2,0) 2(2,0)
  silkscreen extent -1.5,-1.25 1.5,1.25
T [mil]
  oct 60x78.74 hole 30 rot 45: 1(0,0)
Wire [mm]
  rect 1x2 smd: 1(-2.6,0) 2(2.6,0)
  silkscreen extent -2.54,-1.14 2.54,1.14

## Part data
C1 C2 C3 C4 C5 C6 C7 C8 C9 C10 C12 C13 C14 C15 C16 C17 C18: library part CAP, "Capacitor"
C11: "Capacitor"
K1 K2 K3 K4 K5 K6 K7: library part SW-PB, "Switch", LatestRevisionDate=17-Jul-2002, LatestRevisionNote="Re-released for DXP Platform.", PackageReference=SPST-2, Published=24-Mar-1999, Publisher="Altium Limited"
L1 L2 L3 L4 L5 L6: library part INDUCTOR
P1: "Header, 5-Pin, Dual row", LatestRevisionDate=17-Jul-2002, LatestRevisionNote="Re-released for DXP Platform.", Publisher="Altium Limited"
R1 R2 R3 R4 R5 R6: library part RES2
Y1: library part CY_3225
Y2: library part CRYSTAL, "Crystal"

## Via types
v1: diameter 19.68, hole 11.81, Top Layer to Bottom Layer, 50 vias

## Nets (pads, with @x,y where several pads share a name; then routed paths per layer and width w, separated by ;. In a path a pad name is that pad's centre, name@x,y a point inside that pad or via, vN(x,y) a via of type N, cw(c..) or ccw(c..) an arc to the next point about the centre after c; other vN are vias at no path point)
GND: C1.2 C2.2 C3.2 C4.2 C5.2 C6.2 C7.1 C8.1 C11.2 C12.2 C14.2 C15.2 C16.2 C17.2 C18.2 K1.1 K2.1 K3.1 K4.1 K5.1 K6.1 K7.1 L4.1 P1.1 R2.1 R3.2 R5.1 R6.1 U1.1 U1.41 Y1.2 Y1.4 | length 177
  Top Layer w10: C18.2 99,278.49 v1(99,229)
  Top Layer w11.81: C1.2 -20.57,341 -2.74,323.17 -2.74,314 9.26,302 C17.2 ; L4.1 v1(212.65,-99)
  other v1: -336,-334 -407,-238 511,-186.14 -106,-137 -455,-124 -126.42,-116 511,-93 34,-44 82,-42 234,-22 -472,-1 34,2.5 509,2 82,3.5 34,49 82,49 509,105 -154,116.44 -461,121 -131.83,145 507,201.61 -414,234 336.22,252 470,297 -339,335 18,380 151,381 -242,382 -149.83,382 -57.67,382 218.83,382 311,382 415.75,383
Net_1: ?.1 R1.2 R2.2 | length 491.7
  Top Layer w10: R1.2 398.65,189.84 R2.2
  Top Layer w20: ?.1 cw(c120.51,224.86) R2.2
NetC9_1: C9.1 U1.25 | length 124.9
  Top Layer w10: U1.25 192.18,-8.89 211.17,-27.87 211.17,-65.82 C9.1
NetC9_2: C9.2 C10.1 L4.2 | length 186.3
  Top Layer w10: L4.2 C9.2 279,-39.96 279,1.9 305.5,28.4 C10.1
NetC10_2: C10.2 L2.1 L5.2 | length 132.9
  Top Layer w10: L5.2 C10.2 397.84,-10.96 L2.1
NetC11_1: C11.1 L2.2 L3.1 | length 115.6
  Top Layer w10: C11.1 436,-69.19 L3.1
NetC12_1: C12.1 C13.2 L5.1 | length 158.2
  Top Layer w10: C13.2 279,46.49 279,71.27 L5.1 C12.1
NetC13_1: C13.1 U1.26 | length 80.1
  Top Layer w10: U1.26 204.3,10.8 C13.1
NetC14_1: C14.1 U1.40 | length 229
  Top Layer w10: C14.1 -183.84,254.1 -72.69,142.95 U1.40
NetC15_1: C15.1 U1.23 Y1.1 | length 341.2
  Top Layer w10: U1.23 156.75,-48.26 186.99,-78.51 186.99,-85.99 187,-148 198,-159 262.06,-159 304.82,-116.23 C15.1@304.82,-50
NetC16_1: C16.1 U1.22 Y1.3 | length 413.2
  Top Layer w10: U1.22 135.21,-68.96 152,-68.96 169,-85.96 169,-155.46 191.54,-178 268.51,-178 279.51,-167 337.82,-167 366.86,-196.03 Y1.3 367.24,-213.65 C16.1
NetC17_1: C17.1 U1.33 Y2.1 | length 480.8
  Top Layer w10: U1.33 65.11,179.54 74.95,189.38 74.95,249.34 50,274.29 50,314.16 23.16,341 C17.1 45.43,365 127,365 177.7,314.3 Y2.1
NetC18_1: C18.1 U1.32 Y2.2 | length 420.2
  Top Layer w10: C18.1 85.35,340.65 134,292 134,218 ; U1.32@84,129 84,168 134,218 ; Y2.2 218.72,218 134,218
NetL3_2: L3.2 R1.1 R6.2 | length 107.9
  Top Layer w10: L3.2 398.65,45.04 R6.2 398.16,98.65 R1.1
NetR3_1: R3.1 U1.30 | length 122.7
  Top Layer w10: U1.30 134.2,102.7 R3.1
NetR4_2: R4.2 T1.1 | length 88.7
  Top Layer w10: T1.1@359,-401 359,-325 R4.2
P00: K1.2 U1.19 | length 500.1
  Top Layer w10: K1.2 -268.78,-288 20,-288 84.79,-223.21 U1.19
P01: K2.2 U1.18 | length 550.5
  Top Layer w10: K2.2 -260.15,-196.85 -186.99,-270.01 -1.01,-270.01 65.11,-203.89 U1.18
P02: K3.2 U1.17 | length 588.7
  Top Layer w10: K3.2 -327.1,-101.9 -180,-249 -5.44,-249 45.42,-198.13 U1.17
P03: K4.2 U1.16 | length 605.8
  Top Layer w10: K4.2 -162.69,-231.01 -14.01,-231.01 25.74,-191.26 U1.16
P04: K5.2 U1.15 | length 649.2
  Top Layer w10: K5.2 -334.99,56.6 -334.99,-33.26 -155.24,-213.02 -21.46,-213.02 6.05,-185.5 U1.15
P05: K6.2 U1.14 | length 675
  Top Layer w10: K6.2 -317,172.9 -317,-25.81 -147.79,-195.02 -29.02,-195.02 -13.63,-179.63 U1.14
P06: K7.2 U1.13 | length 695.8
  Top Layer w10: K7.2 -268,268 -268,210 -298,180 -298,-19.37 -140.34,-177.03 -48.03,-177.03 -33.32,-162.32 U1.13
P14: P1.5 U1.6 | length 624.5
  Top Layer w10: v1(-190,-37) -161.89,-8.89 U1.6
  Bottom Layer w10: v1(-190,-37) -190,-179 -50,-319 -50,-433.07 P1.5
P15: P1.6 U1.5 | length 551.2
  Top Layer w10: v1(-189,-3) -175.2,10.8 U1.5
  Bottom Layer w10: v1(-189,-3) -162,-30 -162,-170 0,-332 P1.6
P16: P1.8 U1.38 | length 759.9
  Top Layer w10: v1(-71,204) -72,204 -33.32,165.32 U1.38
  Bottom Layer w10: v1(-71,204) -71,-109 100,-280 P1.8
P17: P1.10 U1.37 | length 782
  Top Layer w10: v1(-39.5,204) -13.63,178.13 U1.37
  Bottom Layer w10: v1(-39.5,204) -39.5,-97.5 191,-328 191,-374.07 P1.10
P20: R4.1 R5.2 U1.36 | length 894.6
  Top Layer w10: v1(-8,206) 6.05,191.95 U1.36 ; v1(309,-278) 423.81,-278 R5.2
  Bottom Layer w10: v1(-8,206) -8,-80 190,-278 v1(309,-278)
P21: P1.4 U1.35 | length 969.4
  Top Layer w10: v1(12,234) 16.02,234 25.74,224.28 U1.35
  Bottom Layer w10: P1.4 -100,-305 -212.83,-192.17 -212.83,150.17 -128.01,235 15.02,235 14.02,234 v1(12,234)
P22: P1.3 U1.34 | length 1166.7
  Top Layer w10: v1(28,264) 45.42,246.58 U1.34
  Bottom Layer w10: P1.3 -154,-429.07 -154,-287 -230.83,-210.17 -230.83,186.17 -153,264 v1(28,264)
RESET: P1.7 U1.20 | length 409.3
  Top Layer w10: P1.7 50,-433.07 50,-299 104.48,-244.52 U1.20
VCC: C1.1 C2.1 C3.1 C4.1 C5.1 C6.1 C7.2 C8.2 L1.2 L6.2 U1.4 U1.10 U1.21 U1.24 U1.27 U1.28 U1.29 U1.31 U1.39 | length 2390.7
  Top Layer w10: v1(-210,269) L6.2 C3.1 ; U1.10 -195.37,-87.63 -212.83,-70.17 -212.83,27.65 C3.1 ; U1.4 C3.1 ; C2.1@-79,300.3 C2.1 ; U1.39 -53,148.71 -132.27,227.98 C5.1 C2.1 ; v1@-53,301 v1@-54,302 ; C1.1 v1@-54,302 ; U1.31 104.48,152.48 143,191 v1(179,191) ; U1.21 134.1,-241.26 C6.1 C4.1 ; U1.24 179.57,-28.57 v1(188,-37) ; U1.29 U1.29@144.04,69.85 ; U1.27@144.04,31.51 U1.29@144.04,69.85 ; v1(188,-210) 187.92,-210.08 C4.1 ; C7.2 C8.2 211.11,69.85 U1.29@144.04,69.85 ; L1.2 C4.1 ; C2.1 v1@-54,302
  Bottom Layer w10: v1(-210,269) -176,303 v1(-54,303) 67,303 v1(179,191) 188,182 v1(188,69) v1(188,-37) v1(188,-210)
VCCin: L1.1 L6.1 P1.2 P1.9 | length 1386.9
  Top Layer w11.81: v1(-255,124) -255,122.44 -249,116.44 L6.1 ; P1.2 -176.48,-383.07 -146,-413.56 -146,-529 -121,-554 129.07,-554 P1.9 272,-411.07 272,-313 L1.1
  Bottom Layer w11.81: v1(-255,124) -255,-213 -206,-262 -206,-377.07 P1.2
pads on no net: ?.2 U1.2 U1.3 U1.7 U1.8 U1.9 U1.11 U1.12

## Polygon pours and split planes (outlines as drawn)
GND on Top Layer "GND_L01_P014" (solid, remove dead copper, pour order 14): -612,400.99 -612,-842 -610,-840 603,-840 603,400.99
GND on Bottom Layer "GND_L02_P016" (solid, remove dead copper, pour order 16): -611,400 -620,-845 598,-845 603,-840 603,400

## Keep-outs
Keep-Out Layer:
  lines w10: -176.02,-563.71 cw(c0,0) 173.23,-564.57 173.23,-840.16 -173.23,-840.16 -173.23,-564.57

## Silkscreen, mask and mechanical layers (free items; w line width, h text height)
Top Overlay:
  text "VCC" at -156.49,-681.25 h31.5 r270
  text "P21" at -86.36,-681.25 h31.5 r270
  text "P15" at -16.24,-681.25 h31.5 r270
  text "P16" at 53.88,-681.25 h31.5 r270
  text "P17" at 124,-681.25 h31.5 r270
  text "P14" at -15,-803.75 h31.5 r270
  text "GND" at -154,-809 h31.5 r270
  text "P22" at -84.5,-809 h31.5 r270
  text "RST" at 54.5,-809 h31.5 r270
  text "VCC" at 124,-809 h31.5 r270